# EAGLE board 50x50element (EAGLE 7.6.0)
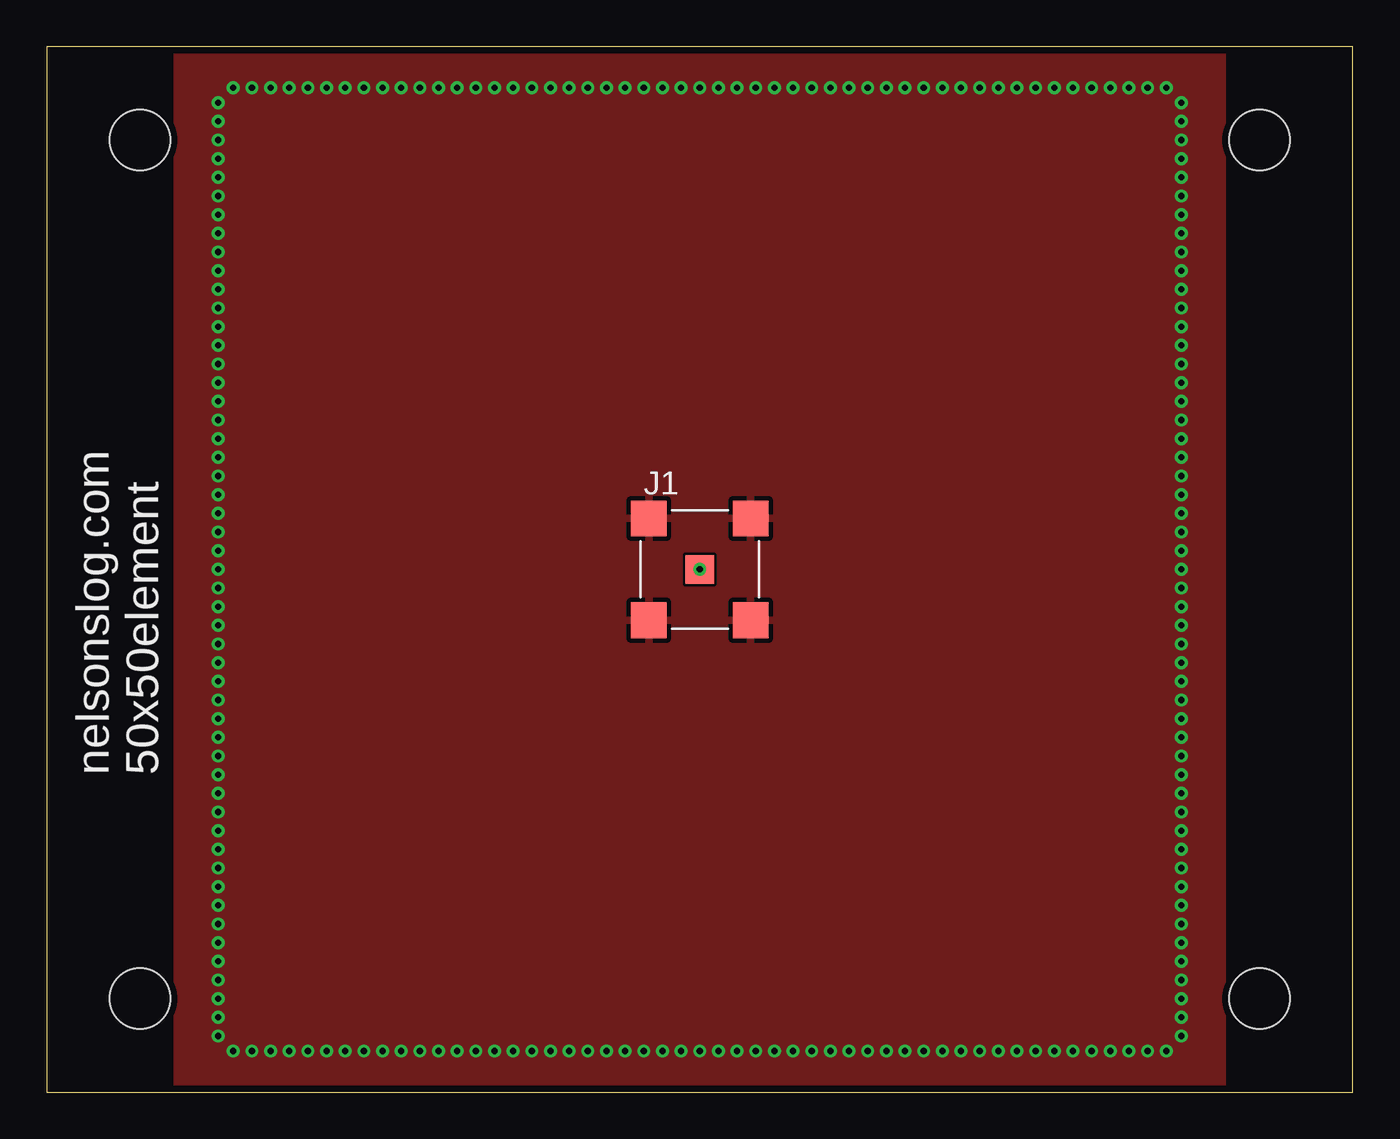
[diagram p0: board, top side]
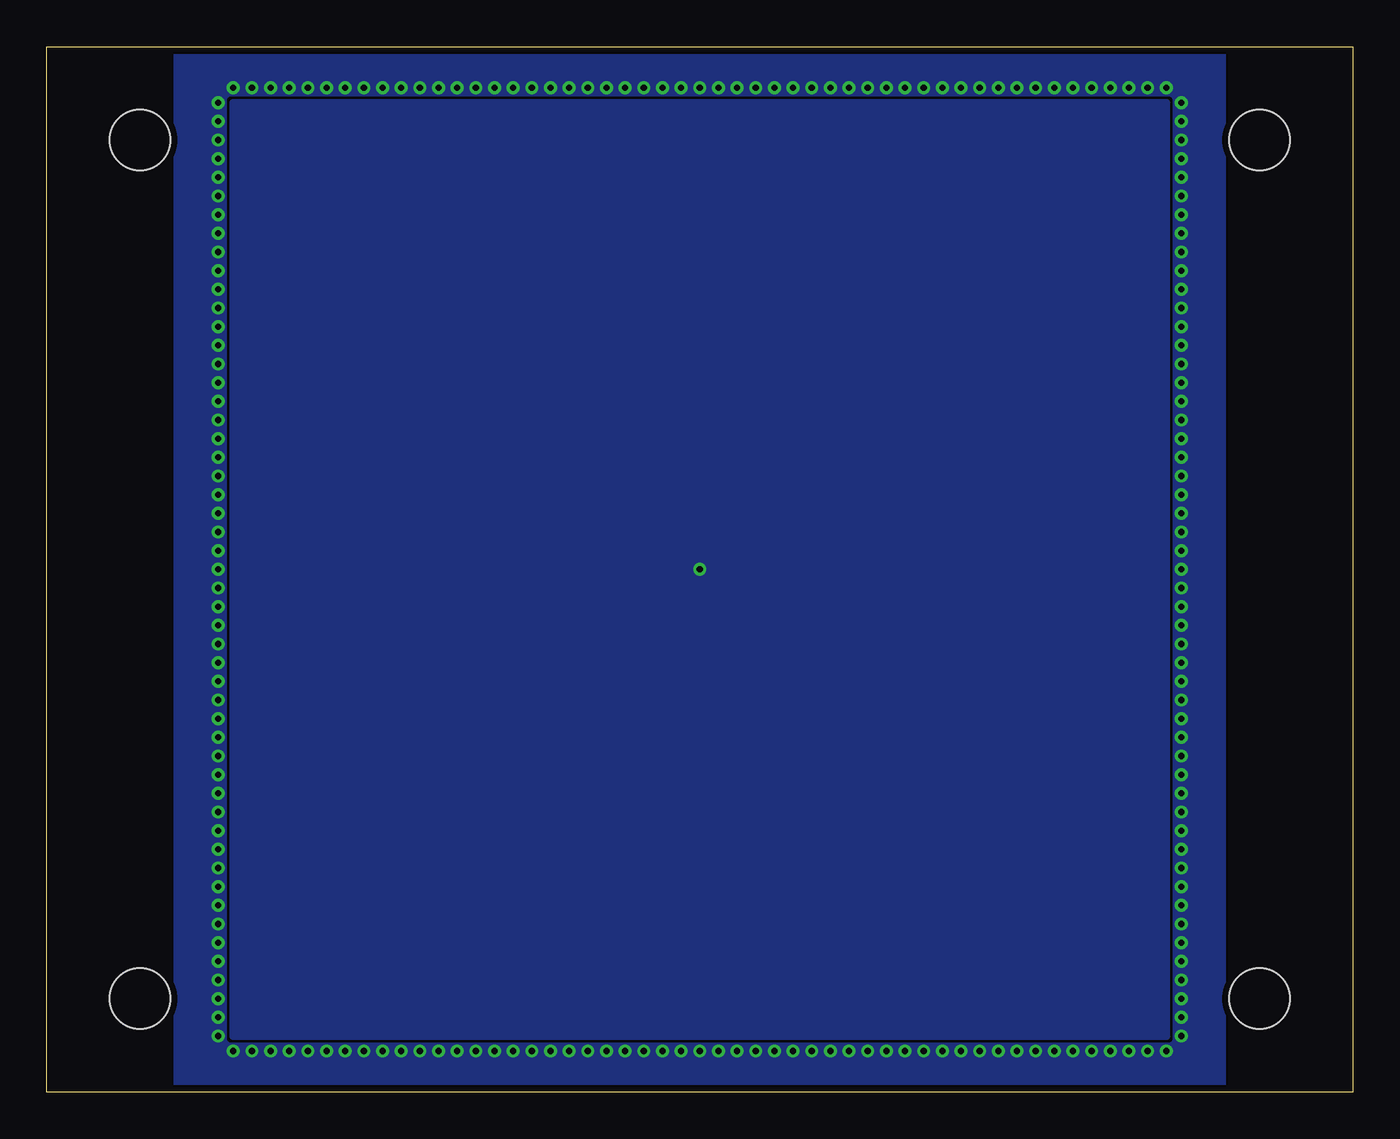
[diagram p1: board, bottom side, seen from below]

Size 70 x 56 mm. Coordinates in mm from the lower left corner, seen from the top.
Outline: 0,0 70,0 70,56 0,56 0,0
Copper layers (1*16): Top 0.0356mm / dielectric 1.5011mm / Bottom 0.0356mm
Design rules "oshpark-2layer": minimum track width 6mil, minimum drill 13mil, track to track 6mil, track to pad 6mil, pad to pad 6mil, via to via 6mil, smd to smd 6mil, copper to edge 15mil, drill to drill 6mil, minimum pad ring 7mil, minimum via ring 7mil, stop-mask expansion 2.5mil, vias tented up to drill 0mil, thermal gap 10mil
Holes 3.25 mm at 5,5 5,51 65,5 65,51

## Footprints (pad centres in the part's own frame; a part is rotated, then mirrored left to right if it is on the bottom)
0732511352 = smd 1.91 x 1.91: SHLD1 -2.73,2.73; SHLD2 2.73,2.73; SHLD3 2.73,-2.73; SHLD4 -2.73,-2.73 | smd 1.52 x 1.52: SIG 0,0

## Placement (x,y rotation side)
J1  SMA-SMT-  [0732511352]  35,28 0 top

## Library data of the parts
J1 = myLib; MFG: molex; MPN: 0732511352

## Nets
SHLD: J1.SHLD1 J1.SHLD2 J1.SHLD3 J1.SHLD4
SIG: J1.SIG

## Tracks (layer width: path | path; a pad name or v marks a point on that pad's centre or on a via)
SHLD  (via drill 0.33)
  other vias: 9.2,52 9.2,51 9.2,50 9.2,49 9.2,48 9.2,47 9.2,46 9.2,45 9.2,44 9.2,43 9.2,42 9.2,41 9.2,40 9.2,39 9.2,38 9.2,37 9.2,36 9.2,35 9.2,34 9.2,33 9.2,32 9.2,31 9.2,30 9.2,29 9.2,28 9.2,27 9.2,26 9.2,25 9.2,24 9.2,23 9.2,22 9.2,21 9.2,20 9.2,19 9.2,18 9.2,17 9.2,16 9.2,15 9.2,14 9.2,13 9.2,12 9.2,11 9.2,10 9.2,9 9.2,8 9.2,7 9.2,5 9.2,6 9.2,4 9.2,3 10,2.2 11,2.2 12,2.2 13,2.2 14,2.2 15,2.2 16,2.2 17,2.2 18,2.2 19,2.2 20,2.2 21,2.2 22,2.2 23,2.2 24,2.2 25,2.2 26,2.2 27,2.2 28,2.2 29,2.2 30,2.2 31,2.2 32,2.2 33,2.2 34,2.2 35,2.2 36,2.2 37,2.2 38,2.2 40,2.2 39,2.2 41,2.2 42,2.2 43,2.2 44,2.2 45,2.2 46,2.2 47,2.2 48,2.2 49,2.2 50,2.2 51,2.2 52,2.2 53,2.2 54,2.2 55,2.2 56,2.2 57,2.2 58,2.2 59,2.2 60,2.2 60.8,3 60.8,4 60.8,5 60.8,6 60.8,7 60.8,8 60.8,9 60.8,10 60.8,11 60.8,12 60.8,13 60.8,14 60.8,15 60.8,16 60.8,17 60.8,18 60.8,19 60.8,20 60.8,21 60.8,22 60.8,23 60.8,24 60.8,25 60.8,26 60.8,27 60.8,28 60.8,29 60.8,30 60.8,31 60.8,32 60.8,33 60.8,34 60.8,35 60.8,36 60.8,37 60.8,38 60.8,39 60.8,40 60.8,41 60.8,42 60.8,43 60.8,44 60.8,45 60.8,46 60.8,47 60.8,48 60.8,49 60.8,50 60.8,51 60.8,52 60.8,53 59,53.8 60,53.8 58,53.8 57,53.8 56,53.8 55,53.8 54,53.8 53,53.8 52,53.8 51,53.8 50,53.8 49,53.8 48,53.8 47,53.8 46,53.8 45,53.8 44,53.8 43,53.8 42,53.8 41,53.8 40,53.8 39,53.8 38,53.8 37,53.8 36,53.8 35,53.8 34,53.8 33,53.8 32,53.8 31,53.8 30,53.8 29,53.8 28,53.8 26,53.8 27,53.8 25,53.8 24,53.8 23,53.8 22,53.8 21,53.8 20,53.8 19,53.8 18,53.8 17,53.8 16,53.8 15,53.8 14,53.8 13,53.8 12,53.8 11,53.8 10,53.8 9.2,53
  pour Top (rank 2): 7,0 63,0 63,56 7,56
  pour Bottom (rank 2): 7,0 63,0 63,56 7,56
SIG  (via drill 0.33)
  other vias: 35,28
  pour Bottom: 10,53 10,3 60,3 60,53

## Text on the board
tPlace: nelsonslog.com / 50x50element